# EAGLE board Probe Board 1.0 (EAGLE 9.3.0)
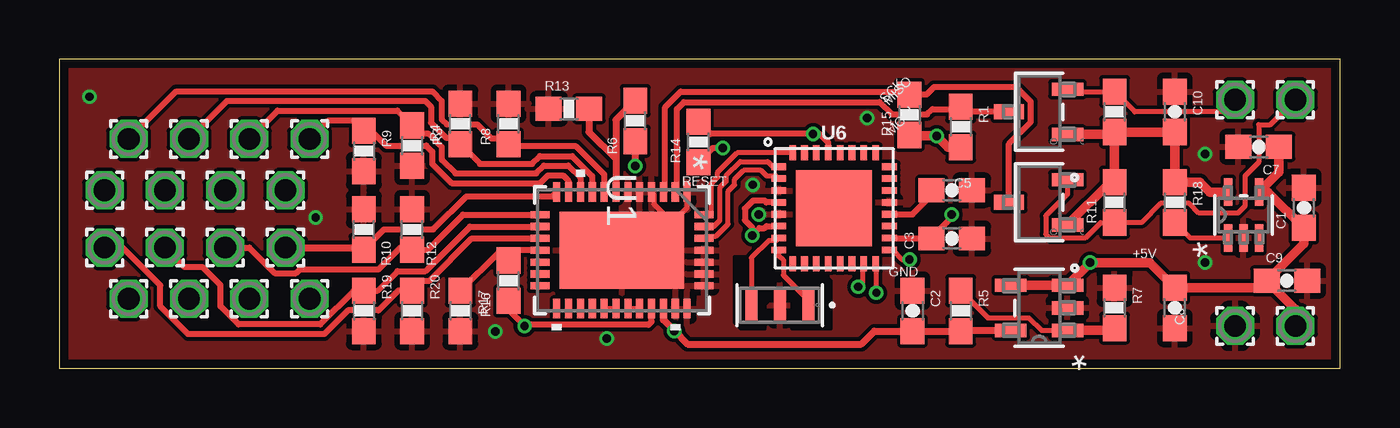
[diagram p0: board, top side]
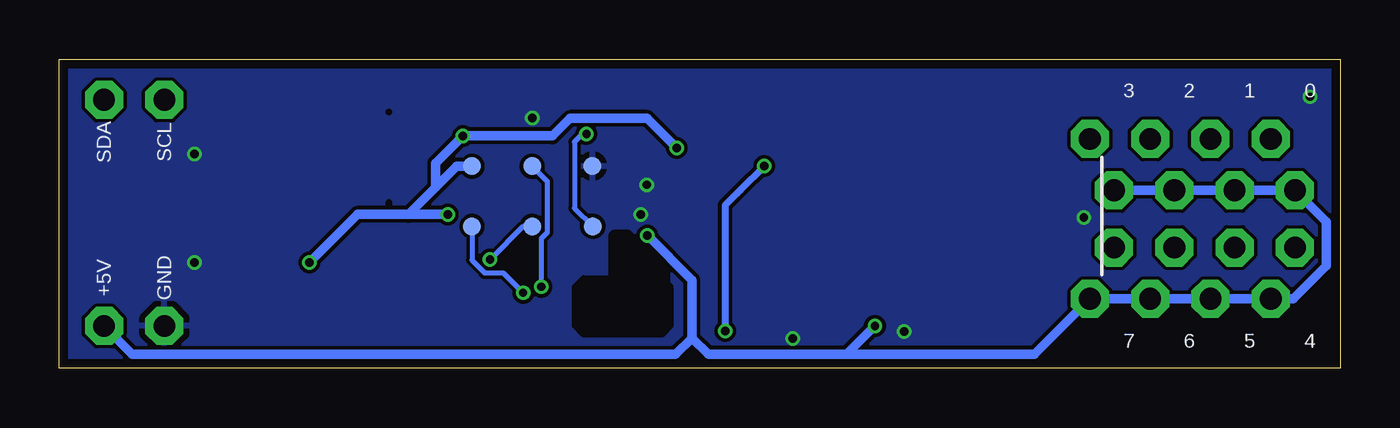
[diagram p1: board, bottom side, seen from below]

Size 53.95 x 13.01 mm. Coordinates in mm from the lower left corner, seen from the top.
Outline: 0,0 53.95,0 53.95,13.01 0,13.01 0,0
Copper layers (1*16): Top 0.035559375mm / dielectric 1.6mm / Bottom 0.035559375mm
Design rules "oshpark-2layer": minimum track width 6mil, minimum drill 10mil, track to track 6mil, track to pad 6mil, pad to pad 6mil, via to via 6mil, smd to smd 6mil, copper to edge 15mil, drill to drill 6mil, minimum pad ring 5mil, minimum via ring 5mil, stop-mask expansion 2.5mil, vias tented up to drill 0mil, thermal gap 10mil
Net classes: 0 default: width 0.203 mm
tRestrict: area 28.4,1.7 to 30.4,4.7; area 30.9,1.7 to 32.5,3.8
bRestrict: area 28.2,1.4 to 32.3,3.8; area 28.3,3.2 to 31.4,5.7

## Footprints (pad centres in the part's own frame; a part is rotated, then mirrored left to right if it is on the bottom)
1,6/0,9 = drill 0.914 pad 1.6 octagon: 1 0,0
0603-CAP = smd 1.1 x 1: 1 -0.85,0; 2 0.85,0
SOT23-3L = smd 0.559 x 1.321: 1 -0.95,-1.194; 2 0.95,-1.194 | smd 0 x 0 bottom: 3 0,1.194 | smd 0.635 x 1.27: 5 0,1.27
0603-RES = smd 1.1 x 1: 1 -0.85,0; 2 0.85,0
PAD.03X.03 = smd 0.762 x 0.762: P$1 0,0
QFN-38_UHF = smd 0.805 x 0.3: 1 -2.452,2.75; 2 -2.452,2.25; 3 -2.452,1.75; 4 -2.452,1.25; 5 -2.452,0.75; 6 -2.452,0.25; 7 -2.452,-0.25; 8 -2.452,-0.75; 9 -2.452,-1.25; 10 -2.452,-1.75; 11 -2.452,-2.25; 12 -2.452,-2.75; 20 2.452,-2.75; 21 2.452,-2.25; 22 2.452,-1.75; 23 2.452,-1.25; 24 2.452,-0.75; 25 2.452,-0.25; 26 2.452,0.25; 27 2.452,0.75; 28 2.452,1.25; 29 2.452,1.75; 30 2.452,2.25; 31 2.452,2.75 | smd 0.3 x 0.805: 13 -1.5,-3.452; 14 -1,-3.452; 15 -0.5,-3.452; 16 0,-3.452; 17 0.5,-3.452; 18 1,-3.452; 19 1.5,-3.452; 32 1.5,3.452; 33 1,3.452; 34 0.5,3.452; 35 0,3.452; 36 -0.5,3.452; 37 -1,3.452; 38 -1.5,3.452 | smd 3.25 x 5.25: 39 0,0
21-0057F = smd 1.321 x 0.559: 1 -1.194,0.95; 2 -1.194,0; 3 -1.194,-0.95; 4 1.194,-0.95; 5 1.194,0.95
CSTCE_V = smd 0.508 x 1.448: 1 -1.2,0; 2 0,0; 3 1.2,0
DCK5 = smd 1.168 x 0.356: 1 -0.965,0.65; 2 -0.965,0; 3 -0.965,-0.65; 4 0.965,-0.65; 5 0.965,0.65
QFN32 = smd 0.63 x 0.28: 1 -2.335,1.75; 2 -2.335,1.25; 3 -2.335,0.75; 4 -2.335,0.25; 5 -2.335,-0.25; 6 -2.335,-0.75; 7 -2.335,-1.25; 8 -2.335,-1.75; 17 2.335,-1.75; 18 2.335,-1.25; 19 2.335,-0.75; 20 2.335,-0.25; 21 2.335,0.25; 22 2.335,0.75; 23 2.335,1.25; 24 2.335,1.75 | smd 0.28 x 0.63: 9 -1.75,-2.335; 10 -1.25,-2.335; 11 -0.75,-2.335; 12 -0.25,-2.335; 13 0.25,-2.335; 14 0.75,-2.335; 15 1.25,-2.335; 16 1.75,-2.335; 25 1.75,2.335; 26 1.25,2.335; 27 0.75,2.335; 28 0.25,2.335; 29 -0.25,2.335; 30 -0.75,2.335; 31 -1.25,2.335; 32 -1.75,2.335 | smd 3.2 x 3.2: EP 0,0

## Placement (x,y rotation side)
5V  [1,6/0,9]  52.07,1.78 0 top
C1  10uF  [0603-CAP]  52.43,6.76 90 top
C2  1uF  [0603-CAP]  35.94,2.41 270 top
C3  0.1uF  [0603-CAP]  37.59,5.46 0 top
C5  0.1uF  [0603-CAP]  37.59,7.49 0 top
C7  0.1uF  [0603-CAP]  50.52,9.32 180 top
C8  10uF  [0603-CAP]  46.99,2.54 90 top
C9  0.1uF  [0603-CAP]  51.71,3.68 0 top
C10  0.47uF  [0603-CAP]  46.99,10.79 270 top
GND  [1,6/0,9]  49.53,1.78 0 top
Q3  2N7002  [SOT23-3L]  41.27,10.79 90 top
Q4  2N7002  [SOT23-3L]  41.27,6.99 90 top
R1  10k  [0603-RES]  37.97,10.16 270 top
R2  10k  [0603-RES]  44.45,10.79 270 top
R3  2.2k  [0603-RES]  16.89,10.29 90 top
R4  2.2k  [0603-RES]  14.86,9.37 270 top
R5  30k  [0603-RES]  37.97,2.41 270 top
R6  1k  [0603-RES]  24.26,10.41 90 top
R7  10k  [0603-RES]  44.45,2.54 270 top
R8  2.2k  [0603-RES]  18.92,10.29 90 top
R9  2.2k  [0603-RES]  12.83,9.14 270 top
R10  2.2k  [0603-RES]  12.83,5.84 90 top
R11  10k  [0603-RES]  44.45,6.99 90 top
R12  2.2k  [0603-RES]  14.86,5.84 90 top
R13  1k  [0603-RES]  21.46,10.92 180 top
R14  10k  [0603-RES]  26.92,9.53 90 top
R15  10k  [0603-RES]  35.81,10.67 270 top
R16  1k  [0603-RES]  18.92,3.68 90 top
R17  2.2k  [0603-RES]  16.89,2.41 270 top
R18  30k  [0603-RES]  46.99,6.99 270 top
R19  2.2k  [0603-RES]  12.83,2.41 270 top
R20  2.2k  [0603-RES]  14.86,2.41 270 top
SCL3.3V  [1,6/0,9]  49.53,11.3 0 top
SDA3.3V  [1,6/0,9]  52.07,11.3 0 top
TEMP1  [1,6/0,9]  2.92,9.65 0 top
TEMP1-5V  [1,6/0,9]  6.99,7.49 0 top
TEMP2  [1,6/0,9]  5.46,9.65 180 top
TEMP2-5V  [1,6/0,9]  8,2.92 0 top
TEMP3  [1,6/0,9]  8,9.65 0 top
TEMP3-5V  [1,6/0,9]  2.92,2.92 0 top
TEMP4  [1,6/0,9]  10.54,9.65 0 top
TEMP4-5V  [1,6/0,9]  1.9,7.49 0 top
TEMP5  [1,6/0,9]  9.53,5.08 0 top
TEMP5-5V  [1,6/0,9]  5.46,2.92 0 top
TEMP6  [1,6/0,9]  6.99,5.08 0 top
TEMP6-5V  [1,6/0,9]  4.45,7.49 0 top
TEMP7  [1,6/0,9]  4.45,5.08 0 top
TEMP7-5V  [1,6/0,9]  9.53,7.49 0 top
TEMP8  [1,6/0,9]  1.9,5.08 0 top
TEMP8-5V  [1,6/0,9]  10.54,2.92 0 top
TP1  TEST-POINT3  [PAD.03X.03]  36.58,5.97 180 bottom
TP2  TEST-POINT3  [PAD.03X.03]  36.58,8.51 270 bottom
TP3  TEST-POINT3  [PAD.03X.03]  34.04,5.97 180 bottom
TP4  TEST-POINT3  [PAD.03X.03]  34.04,8.51 180 bottom
TP5  TEST-POINT3  [PAD.03X.03]  31.48,5.97 180 bottom
TP6  TEST-POINT3  [PAD.03X.03]  31.5,8.51 180 bottom
U1  LTC2495CUHFPBF  [QFN-38_UHF]  23.7,4.97 270 top
U3  MAX6037AAUKADJ+T  [21-0057F]  41.27,2.54 180 top
U4  CSTCE16M0V53A-R0  [CSTCE_V]  30.35,2.65 180 top
U5  TPS79733DCKR  [DCK5]  49.89,6.45 90 top
U6  ATMEGA328P_TQFPQFN_32  [QFN32]  32.64,6.73 0 top

## Library data of the parts
5V GND SCL3.3V SDA3.3V TEMP1 TEMP1-5V TEMP2 TEMP2-5V TEMP3 TEMP3-5V TEMP4 TEMP4-5V TEMP5 TEMP5-5V TEMP6 TEMP6-5V TEMP7 TEMP7-5V TEMP8 TEMP8-5V = wirepad
C1 C8 = SparkFun; DIGIKEY_PART_NUMBER: 445-9104-6-ND; MANUFACTURER: TDK Corporation; MANUFACTURER_PART_NUMBER: C1608X7S0J106M080AC; PRICE: 0.18328
C2 = SparkFun; DIGIKEY_PART_NUMBER: 1276-1184-6-ND; MANUFACTURER: Samsung Electro-Mechanics; MANUFACTURER_PART_NUMBER: CL10B105KA8NNNC; PRICE: 0.01719
C3 C5 C7 C9 = SparkFun; DIGIKEY_PART_NUMBER: 478-7939-2-ND; MANUFACTURER: AVX Corporation; MANUFACTURER_PART_NUMBER: 0603ZC104KAT2A; PRICE: 0.08325
C10 = SparkFun; DIGIKEY_PART_NUMBER: 478-10367-1-ND; MANUFACTURER: AVX Corporation; MANUFACTURER_PART_NUMBER: 0603ZC474KAT2A; PRICE: 0.02904
Q3 = 2N7002(2); DIGIKEY_PART_NUMBER: 2N7002NCT-ND; MANUFACTURER: ON Semiconductor; MANUFACTURER_PART_NUMBER: 2N7002; PRICE: 0.06193; VENDOR: ON Semiconductor
Q4 = 2N7002(2); DIGIKEY_PART_NUMBER: 2N7002NCT-ND; MANUFACTURER: ON Semiconductor; MANUFACTURER_PART_NUMBER: 2N7002; PRICE: 0.06193; VENDOR: STMicroelectronics
R1 R2 R7 R11 R14 R15 = SparkFun; DIGIKEY_PART_NUMBER: P10KGTR-ND; MANUFACTURER: Panasonic Electronic Components; MANUFACTURER_PART_NUMBER: ERJ-3GEYJ103V; PRICE: 0.00494
R3 R4 R8-R10 R12 R17 R19 R20 = SparkFun; DIGIKEY_PART_NUMBER: P2.2KDBTR-ND; MANUFACTURER: Panasonic Electronic Components; MANUFACTURER_PART_NUMBER: ERA-3AEB222V; PRICE: 0.03717
R5 R18 = SparkFun; DIGIKEY_PART_NUMBER: P30KGDKR-ND; MANUFACTURER: Panasonic Electronic Components; MANUFACTURER_PART_NUMBER: ERJ-3GEYJ303V; PRICE: 0.00758
R6 R13 R16 = SparkFun; DIGIKEY_PART_NUMBER: P1.0KDBDKR-ND; MANUFACTURER: Panasonic Electronic Components; MANUFACTURER_PART_NUMBER: ERA-3AEB102V; PRICE: 0.04906
TP1-TP6 = SparkFun-Passives
U1 = LTC2495; DIGIKEY_PART_NUMBER: LTC2495IUHF#PBF-ND; MANUFACTURER: Linear Technology/Analog Devices; MANUFACTURER_PART_NUMBER: LTC2495CUHF#PBF; PRICE: 5.11040; VENDOR: Linear Technology
U3 = MAX6037AAUKADJ; DIGIKEY_PART_NUMBER: MAX6037AAUK33+TCT-ND; MANUFACTURER: Maxim Integrated; MANUFACTURER_PART_NUMBER: MAX6037AAUK33+T; PRICE: 2.59488; VENDOR: Maxim Integrated Products
U4 = Murata Resonator; DIGIKEY_PART_NUMBER: 490-1198-1-ND; MANUFACTURER: Murata Electronics North America; MANUFACTURER_PART_NUMBER: CSTCE16M0V53-R0; PRICE: 0.26858; VENDOR: Murata
U5 = TPS79733; DIGIKEY_PART_NUMBER: 296-11990-6-ND; MANUFACTURER: Texas Instruments; MANUFACTURER_PART_NUMBER: TPS79733DCKR; PRICE: 0.46196; VENDOR: Texas Instruments
U6 = bschulz; DIGIKEY: ATMEGA328P-MURCT-ND; MF: Atmel; MPN: ATMEGA328P-MUR

## Nets
3.3V: C10.2 Q3.1 Q4.1 R2.2 R11.2 R18.1 U5.5
+5V: 5V.1 C1.1 C3.1 C7.1 C8.2 C9.1 R1.2 R14.1 R15.2 R16.1 TEMP1-5V.1 TEMP2-5V.1 TEMP3-5V.1 TEMP4-5V.1 TEMP5-5V.1 TEMP6-5V.1 TEMP7-5V.1 TEMP8-5V.1 TP2.P$1 U1.28 U3.3 U3.4 U5.4 U6.4 U6.6 U6.18
AREF: C5.1 U6.20
CH0: R8.1 TEMP1.1 U1.8
CH1: R3.1 TEMP2.1 U1.9
CH2: R4.1 TEMP3.1 U1.10
CH3: R9.1 TEMP4.1 U1.11
CH4: R10.1 TEMP5.1 U1.12
CH5: R12.1 TEMP6.1 U1.13
CH6: R19.1 TEMP7.1 U1.14
CH7: R20.1 TEMP8.1 U1.15
COM: C1.2 C2.1 C3.2 C5.2 C7.2 C8.1 C9.2 C10.1 GND.1 R3.2 R4.2 R7.1 R8.2 R9.2 R10.2 R12.2 R13.2 R17.2 R19.2 R20.2 TP6.P$1 U1.1 U1.4 U1.5 U1.6 U1.30 U1.31 U1.32 U1.33 U1.34 U1.35 U1.39 U3.2 U4.2 U5.2 U6.3 U6.5 U6.21
IO2: U1.38 U6.32
IO3: U1.37 U6.1
IO4: U1.36 U6.2
MISO/IO12: TP1.P$1 U6.16
MOSI/IO11: TP4.P$1 U6.15
N$1: U4.3 U6.7
N$2: U1.26 U1.27
N$3: U1.24 U1.25
N$5: R6.2 R13.1 U1.7
N$6: R5.1 R7.2 U3.1
N$7: U4.1 U6.8
N$9: R18.2 U5.1
REF_V: C2.2 R5.2 R6.1 U1.29 U3.5
RESET: R14.2 TP5.P$1 U6.29
SCK: TP3.P$1 U6.17
SCL3.3V: Q3.2 R2.1 SCL3.3V.1
SCL5V: Q3.5 R1.1 U1.2
SDA3.3V: Q4.2 R11.1 SDA3.3V.1
SDA5V: Q4.5 R15.1 U1.3
VCC_READ: R16.2 R17.1 U1.16

## Tracks (layer width: path | path; a pad name or v marks a point on that pad's centre or on a via)
3.3V
  Top 0.406: U5.5 48.46,7.42 48.05,7.83 R18.1 C10.2 R2.2 | Q4.1 44.27,7.83 R11.2 R2.2 | Q3.1 44.35,9.85 R2.2
+5V  (via drill 0.35)
  Top 0.254: v27.94,9.27 27.52,9.27 R14.1 | R16.1 18.92,2.45 v19.6,1.78 19.65,1.83 24.82,1.83 24.95,1.96 U1.28 | 36.72,5.48 37.59,6.35 v37.59,6.48 | U6.18 36.72,5.48 | 36.72,5.48 C3.1 | U6.6 29.79,5.98 29.7,5.9 29.49,5.9 v29.19,5.59 29.19,5.93 28.88,6.24 28.88,6.72 29.22,7.06 29.7,7.06 29.78,6.98 U6.4
  Top 0.406: C7.1 51.37,8.25 U5.4 50.91,7.42 C1.1 52.43,5.24 C9.1 | C9.1 52.07,2.48 5V.1 | C9.1 50.57,3.39 C8.2 45.94,4.45 v43.42,4.45 U3.3 U3.4 | R15.2 35.85,9.78 v36.96,9.78 37.43,9.31 R1.2
  Bottom 0.406: TEMP7-5V.1 TEMP1-5V.1 TEMP6-5V.1 TEMP4-5V.1 0.58,6.17 0.58,4.32 1.98,2.92 TEMP3-5V.1 TEMP5-5V.1 TEMP2-5V.1 TEMP8-5V.1 12.88,0.58 20.79,0.58 | v19.6,1.78 20.79,0.58 | v37.59,6.48 39.24,6.48 | 39.24,6.48 41.39,6.48 v43.42,4.45 | 38.1,7.62 38.1,8.64 v36.96,9.78 33.18,9.78 32.44,10.53 29.19,10.53 v27.94,9.27 | 38.1,7.62 39.24,6.48 | v29.19,5.59 27.3,3.71 27.3,1.27 | 20.79,0.58 26.62,0.58 27.3,1.27 | 5V.1 50.88,0.58 27.99,0.58 27.3,1.27 | TP2.P$1 37.21,8.51 38.1,7.62
AREF
  Top 0.254: C5.1 36.74,7.28 35.95,6.48 U6.20
CH0
  Top 0.254: U1.8 22.95,8.17 21.78,9.34 19.02,9.34 R8.1 18.68,9.68 18.19,9.68 17.6,10.27 16.32,10.27 16.11,10.47 16.11,11.26 15.71,11.66 4.93,11.66 TEMP1.1
CH1
  Top 0.254: U1.9 22.45,8.09 21.61,8.93 20.24,8.93 19.92,8.61 17.72,8.61 R3.1 16.64,9.69 16.31,9.69 15.65,10.34 15.65,11.02 15.42,11.25 7.06,11.25 TEMP2.1
CH2
  Top 0.254: U1.10 21.95,8.02 21.44,8.53 20.41,8.53 20.09,8.2 16.68,8.2 16.11,8.77 16.11,9.31 15.56,9.87 15.21,9.87 R4.1 14.24,10.85 9.19,10.85 TEMP3.1
CH3
  Top 0.254: U1.11 21.45,7.89 21.21,8.12 20.58,8.12 20.26,7.79 16.51,7.79 15.71,8.6 15.71,9.12 15.46,9.37 13.76,9.37 13.13,9.99 R9.1 12.41,10.41 11.3,10.41 TEMP4.1
CH4
  Top 0.254: R10.1 13.68,5.84 15.75,5.84 17.15,7.24 20.77,7.24 U1.12
  Top 0.305: TEMP5.1 12.74,5.08 R10.1
CH5
  Top 0.254: U1.13 17.01,6.47 15.53,4.99 R12.1 14.77,5.08 14.36,5.08 13.44,4.16 10.13,4.16 9.97,4 9.08,4 8,5.08 TEMP6.1
CH6
  Top 0.254: U1.14 17.29,5.97 15.42,4.09 14.24,4.09 13.41,3.26 R19.1 12.41,3.26 10.99,1.84 7.55,1.84 6.79,2.6 6.79,3.5 6.04,4.25 5.27,4.25 TEMP7.1
CH7
  Top 0.254: U1.15 17.37,5.47 15.59,3.69 15.28,3.69 R20.1 14.27,3.26 13.44,2.43 12.15,2.43 11.16,1.44 5.42,1.44 4.25,2.6 4.25,3.49 2.67,5.08 TEMP8.1
COM  (via drill 0.35)
  Top 0.203: U1.1 26.45,6.76 26.04,6.35 25.61,6.35 25.04,6.91 25.04,7.32 U1.4
  other vias: 48.26,4.45 48.26,9.02 18.36,1.55 23.06,1.24 29.46,6.48 10.79,6.35 1.27,11.43 34.04,10.54 29.21,7.72
  pour Top: 0.32,0.32 53.66,0.32 53.66,12.7 0.32,12.7
  pour Bottom: 53.59,0.38 53.59,12.57 0.38,12.57 0.38,0.38
IO2
  Top 0.203: U1.38 27.33,6.47 27.45,6.59 27.45,7.76 27.73,8.04 27.73,8.25 28.55,9.07 U6.32
IO3
  Top 0.203: U1.37 27.56,5.97 27.82,6.22 27.82,7.59 28.09,7.87 28.09,8.11 28.68,8.7 29.84,8.7 30.06,8.48 U6.1
IO4
  Top 0.203: U1.36 27.25,5.56 27.66,5.56 28.17,6.07 28.17,7.45 28.45,7.72 28.45,7.95 28.83,8.33 29.55,8.33 29.8,8.09 30.2,8.09 U6.2
MISO/IO12  (via drill 0.35)
  Top 0.203: v34.42,3.17 34.39,3.2 U6.16
  Bottom 0.203: v34.42,3.17 35.26,4.02 36.04,4.02 36.58,4.55 TP1.P$1
MOSI/IO11  (via drill 0.35)
  Top 0.203: v33.66,3.43 33.84,3.62 33.84,4.35 U6.15
  Bottom 0.203: v33.66,3.43 33.66,5.45 33.4,5.71 33.4,7.87 TP4.P$1
N$1
  Top 0.203: U6.7 30.2,5.38 29.88,5.38 29.15,4.64 U4.3
N$2
  Top 0.254: U1.26 U1.27
N$3
  Top 0.254: U1.24 U1.25
N$5
  Top 0.305: R13.1 22.31,9.95 23.45,8.81 | 23.45,8.81 U1.7 | R6.2 23.45,10.46 23.45,8.81
N$6
  Top 0.203: U3.1 41.38,1.59 40.85,2.12 39.11,2.12 R5.1
  Top 0.406: U3.1 44.35,1.59 R7.2
N$7
  Top 0.203: U6.8 30.3,4.75 30.5,4.56 30.5,3.92 31.55,2.87 U4.1
N$9
  Top 0.203: R18.2 47.64,5.49 U5.1
REF_V  (via drill 0.35)
  Top 0.305: U3.5 38,1.59 R5.2 C2.2 34.33,1.56 33.78,1.02 26.46,1.02 v25.91,1.57 25.45,2.03 U1.29 | R6.1 v24.26,8.51
  Bottom 0.305: v24.26,8.51 25.27,7.49 25.4,7.37 25.91,6.86 v25.91,1.57
RESET  (via drill 0.35)
  Top 0.254: R14.2 27.43,9.87 v31.75,9.87 32.02,9.87 32.39,9.5 U6.29
  Bottom 0.203: v31.75,9.87 31.93,9.87 32.26,9.53 32.26,6.74 TP5.P$1
SCK  (via drill 0.35)
  Top 0.203: v35.81,4.57 35.5,4.57 35.09,4.98 U6.17
  Bottom 0.203: TP3.P$1 34.42,5.97 v35.81,4.57
SCL3.3V
  Top 0.203: Q3.2 42.57,11.64 R2.1 45.3,10.79 49.02,10.79 SCL3.3V.1
SCL5V
  Top 0.254: U1.2 26.02,7.49 26.02,10.91 26.31,11.2 34.55,11.2 35.07,10.69 36.56,10.69 36.78,10.91 37.88,10.91 R1.1 38.19,10.79 Q3.5
SDA3.3V
  Top 0.203: Q4.2 42.47,7.33 41.55,6.42 41.55,5.65 41.7,5.5 43.23,5.5 43.87,6.13 R11.1 45.58,6.13 46.38,6.94 47.59,6.94 48.01,6.53 49.65,6.53 49.95,6.83 49.95,8.09 50.52,8.67 50.52,10.25 51.02,10.25 SDA3.3V.1
SDA5V
  Top 0.254: U1.3 25.52,7.49 25.52,10.99 26.17,11.64 35.69,11.64 R15.1 36.53,11.52 36.85,11.84 40.31,11.84 40.92,11.23 40.92,10.36 40.01,9.45 Q4.5
VCC_READ
  Top 0.254: U1.16 19.36,4.97 19.26,4.87 | 19.26,4.87 R16.2 | R17.1 18.5,4.87 19.26,4.87

## Text on the board
tPlace: SCK | MISO | MOSI | RESET | +5V | GND
bPlace: 0 | 1 | 2 | 3 | SCL | SDA | GND | +5V | 4 | 5 | 6 | 7